# EAGLE board MovimientoC (EAGLE 7.6.0)
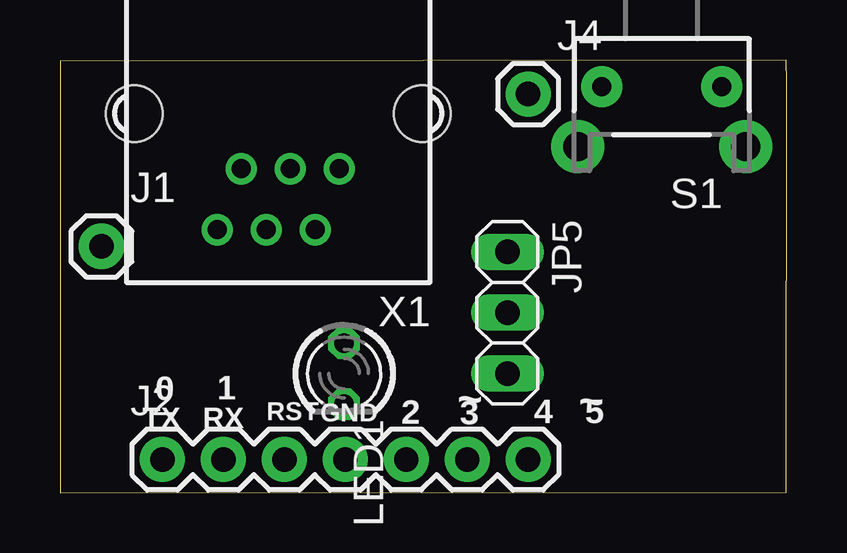
[diagram p0: board, top side]
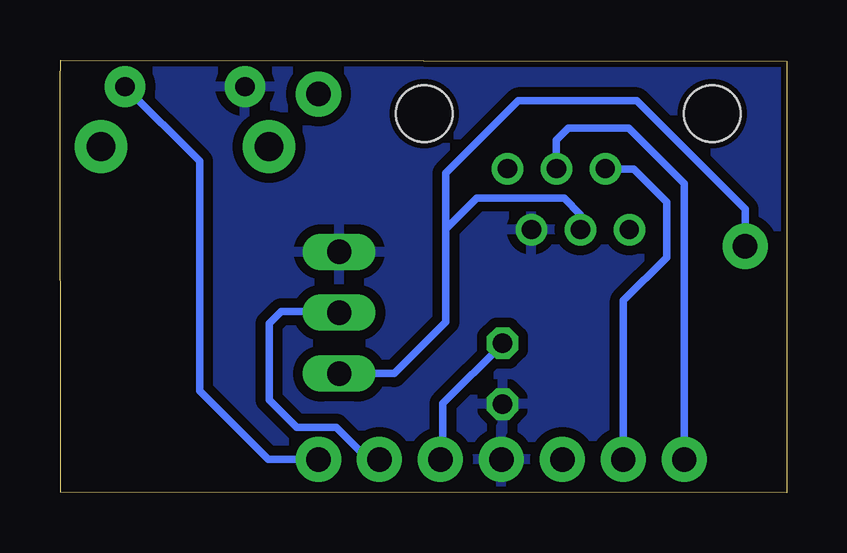
[diagram p1: board, bottom side, seen from below]

Size 30.28 x 18.06 mm. Coordinates in mm from the lower left corner, seen from the top.
Outline: 0,0 30.25,0.02 30.25,0.56 30.28,17.14 30.25,18.06 0,18.01 0,0
Copper layers (1*16): Top 0.035mm / dielectric 1.5mm / Bottom 0.035mm
Design rules "ITEADstudio_DRC *": minimum track width 6mil, minimum drill 12mil, track to track 16mil, track to pad 12mil, pad to pad 6mil, via to via 6mil, smd to smd 0mil, copper to edge 10mil, drill to drill 10mil, minimum pad ring 10mil, minimum via ring 6mil, stop-mask expansion 2mil, vias tented up to drill 100mil, thermal gap 15mil
Net classes: 1 power: width 0.381 mm, clearance 0.254 mm

## Footprints (pad centres in the part's own frame; a part is rotated, then mirrored left to right if it is on the bottom)
1X01 = drill 1.016 pad 1.88: 1 0,0
1X07 = drill 1.016 pad 1.88: 1 0,0; 2 2.54,0; 3 5.08,0; 4 7.62,0; 5 10.16,0; 6 12.7,0; 7 15.24,0
1X03 = drill 1.016 long: 1 -2.54,0; 2 0,0; 3 2.54,0
LED3MM = drill 0.813 octagon: A -1.27,0; K 1.27,0
TACTILE-PTH-SIDEEZ = drill 0.8 pad 1.7: 1 -2.5,0; 2 2.5,0 | drill 1.2 pad 2.2: ANCHOR1 -3.5,2.5; ANCHOR2 3.5,2.5
YH-55-10 = drill 0.8 pad 1.3: 1 -2.54,2.3; 2 -1.54,4.84; 3 -0.5,2.3; 4 0.5,4.84; 5 1.54,2.3; 6 2.54,4.84 | hole 2.36: -6,0; 6,0

## Placement (x,y rotation side)
J1  [1X01]  1.73,10.29 0 top
J2  [1X07]  4.27,1.4 0 top
J4  [1X01]  19.51,16.64 0 top
JP5  [1X03]  18.64,7.52 270 top
LED1  [LED3MM]  11.84,4.98 270 top
S1  SWITCH-MOMENTARY-2SIDE_EZ  [TACTILE-PTH-SIDEEZ]  25.07,16.94 180 top
X1  YH-55-10  [YH-55-10]  9.09,15.82 180 top

## Library data of the parts
J1 J2 J4 = SparkFun-Connectors
JP5 = pinhead
LED1 = led
S1 = SparkFun-Electromechanical
X1 = con-wenzhou-yihua; OC_FARNELL: unknown; OC_NEWARK: unknown

## Nets
AGND [power]: JP5.1
GND [power]: J2.4 LED1.K S1.2 X1.2
N$1: J2.7 S1.1
N$2: J2.5 LED1.A
N$4: J1.1 JP5.3 X1.4
N$6: J2.2 X1.5
N$10: J2.6 JP5.2
VIN: J2.1 X1.3

## Tracks (layer width: path | path; a pad name or v marks a point on that pad's centre or on a via)
AGND
  pour Bottom: 0.08,17.98 30.18,17.88 30.38,0.15 0.2,0.2
GND
  pour Bottom: 0.08,17.88 30.18,18.01 30.25,0.28 0.15,0.15
N$1
  Bottom 0.305: J2.7 21.59,1.4 24.46,4.27 24.46,13.83 S1.1
N$2
  Bottom 0.305: LED1.A 11.84,6.22 14.33,3.73 14.33,1.5 J2.5
N$4
  Bottom 0.305: J1.1 1.73,11.84 6.25,16.36 11.18,16.36 14.2,13.34 14.2,11 | 14.2,11 14.2,7.14 16.36,4.98 JP5.3 | X1.4 8.59,11.62 9.27,12.29 12.9,12.29 14.2,11
N$6
  Bottom 0.305: J2.2 6.81,8.03 5,9.83 5,12.14 6.38,13.51 7.54,13.51 X1.5
N$10
  Bottom 0.305: J2.6 17.42,1.4 18.77,2.74 20.42,2.74 21.57,3.89 21.57,7.06 21.06,7.57 18.69,7.57 JP5.2
VIN
  Bottom 0.305: J2.1 4.27,12.9 6.58,15.21 9.09,15.21 9.6,14.71 9.6,13.53 X1.3

## Text on the board
_tsilk: 0 | 1 | TX | RX | RST | GND | 2 | ~ | 3 | 4 | ~ | 5